# Altium PCB TruckCape for Hammond 1455L - Rev3 - MITM.PcbDoc
Units mil, origin at the board's own origin, x right, y up, seen from the top; angles counter-clockwise.
Board outline 3917.04 x 4734.44 mil, 2 copper layers (Component Side, Bottom Layer), stack 12.8 mil thick; 48 components, 66 nets, 355 pads, 22 vias.
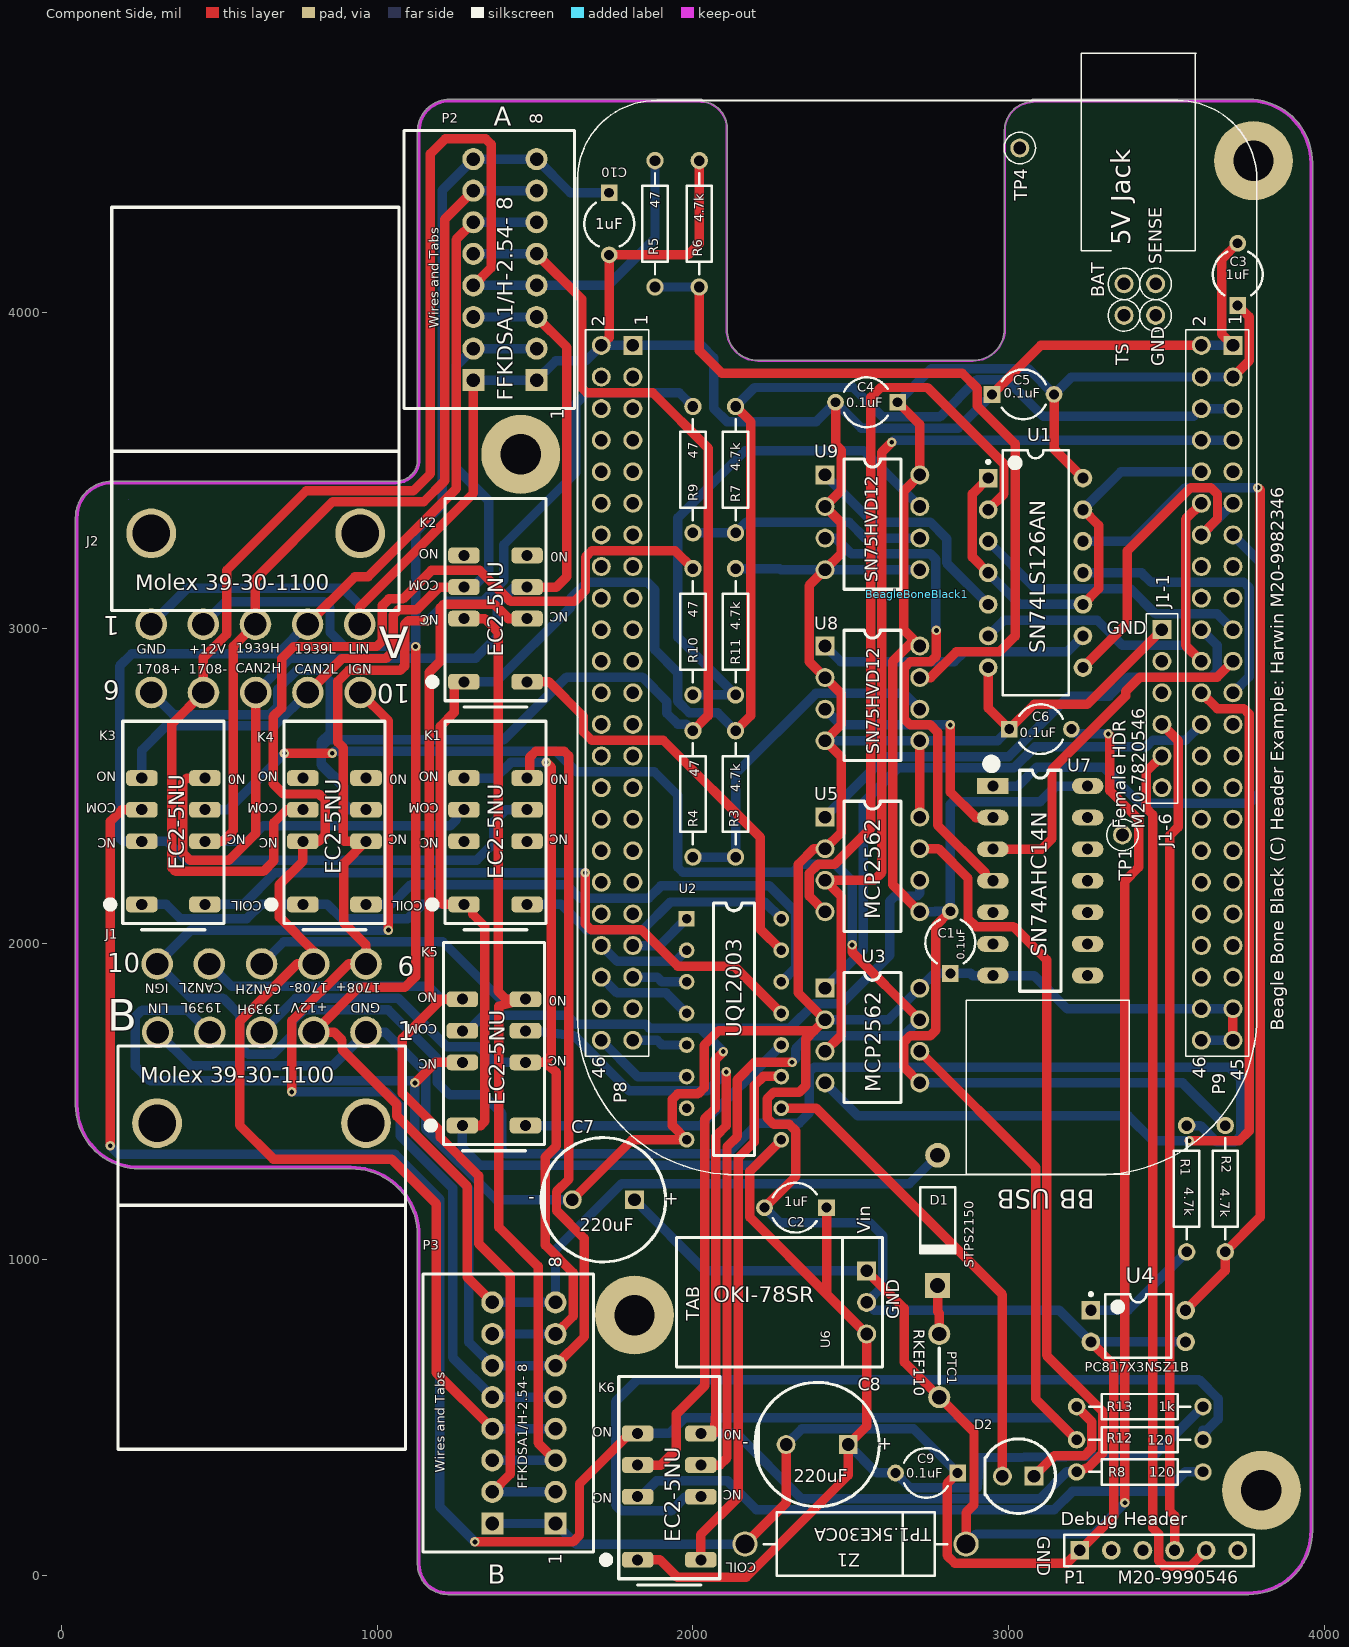
[diagram p0: Component Side view]
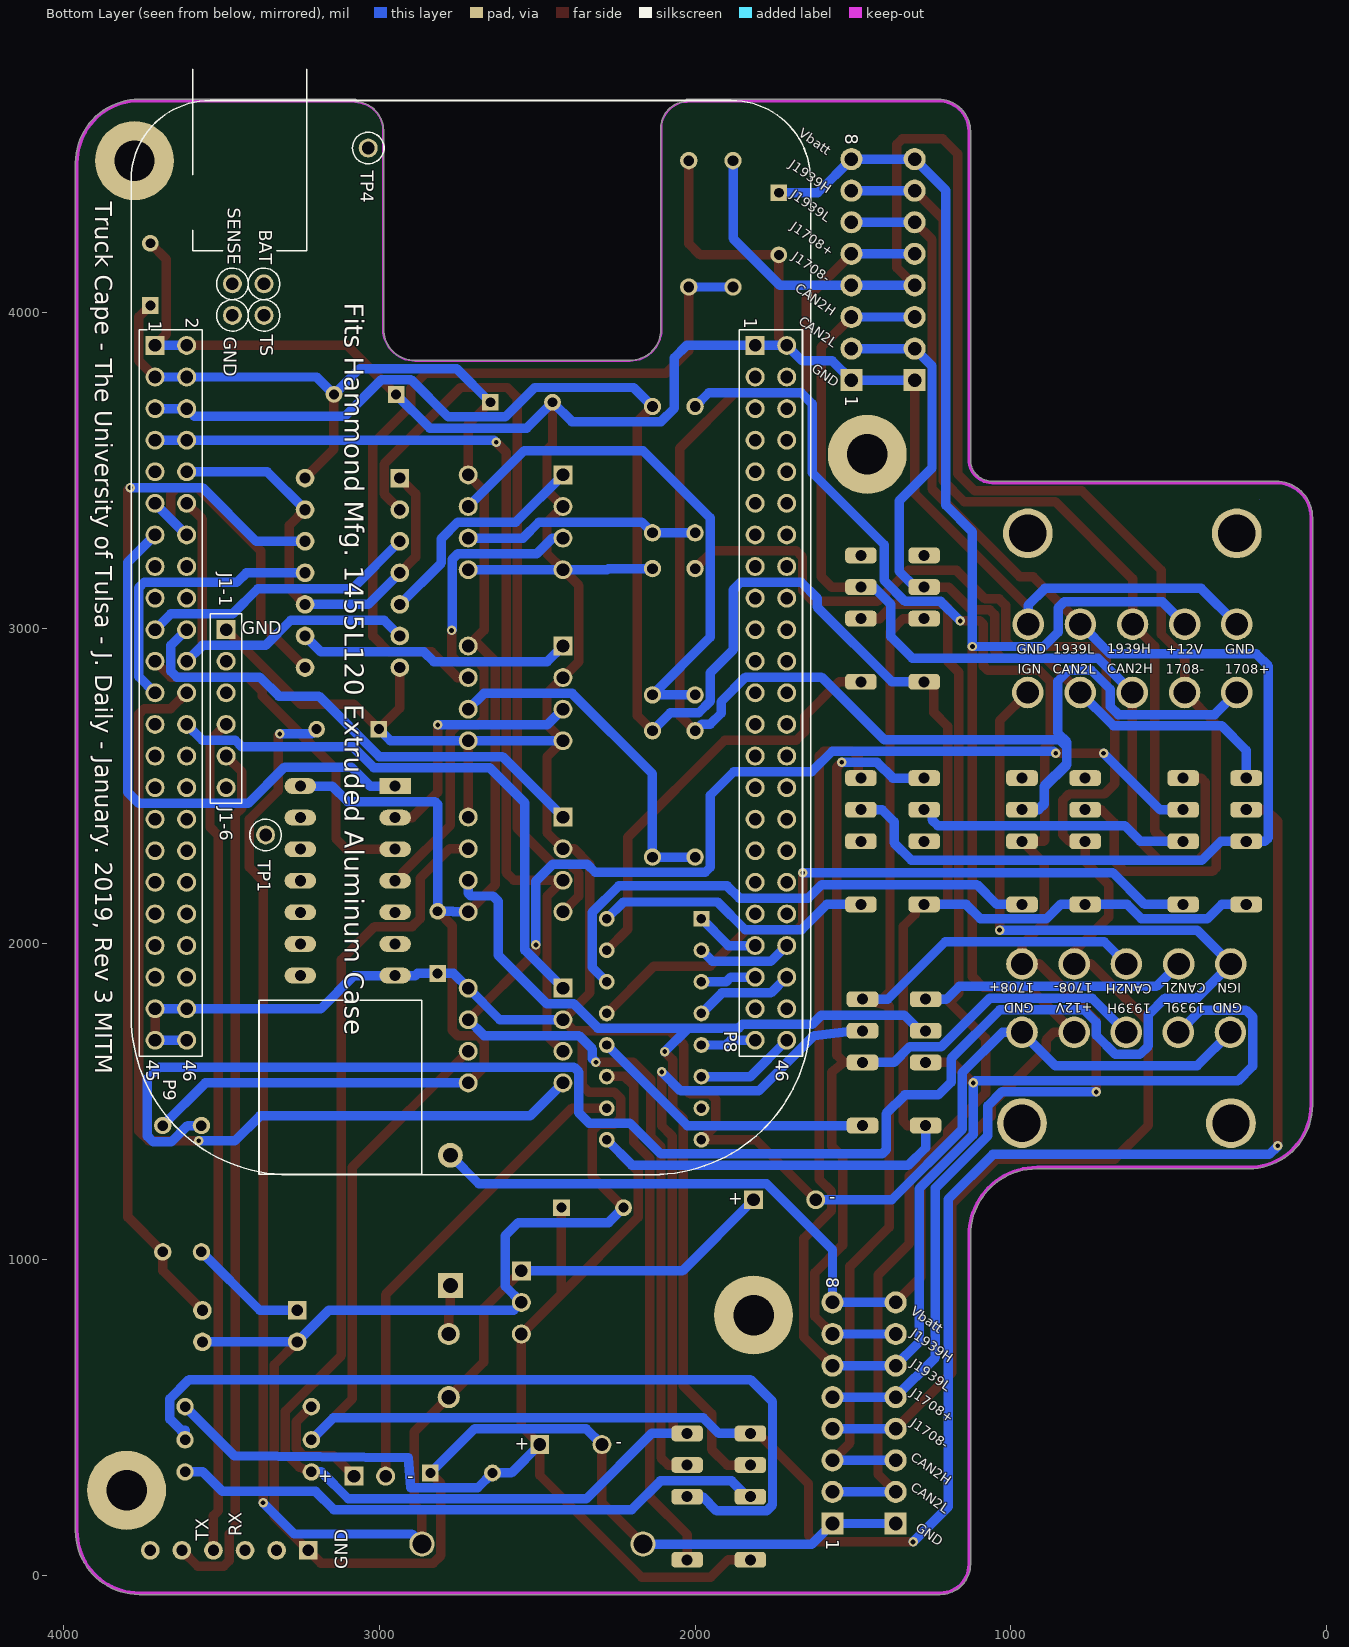
[diagram p1: Bottom Layer view, seen from below]

## Layer stack, top to bottom
Top Solder: solder mask 0.4, Solder Resist, Dk 3.5
Component Side: signal copper 1.4
Dielectric 1: core 10, FR-4, Dk 4.2
Bottom Layer: signal copper 1.4
Solder Side: solder mask 0.4, Solder Resist, Dk 3.5

## Board outline
44.99,1489.82 cw(c246.85,1489.85) 44.99,1489.85 44.98,1489.85 44.98,3350 cw(c160,3350) 160,3465.02 cw(c160,3460) 160.03,3465.01 1059.98,3465.01 ccw(c1059.5,3533.5) 1127.99,3533.5 ccw(c1059.5,3533.5) 1127.99,3533.97 cw(c1133,3534) 1127.98,3534 1127.98,4573 cw(c1229.41,4573) 1229.35,4674.42 cw(c1229.41,4669.41) 1229.41,4674.43 2024.38,4674.43 cw(c2024.38,4669.41) 2029.4,4669.41 cw(c2024.38,4669.41) 2029.05,4667.57 cw(c2024.38,4583.64) 2108.44,4583.69 cw(c2105.92,4583.64) 2108.44,4583.64 2108.44,3945.4 cw(c2105.92,3945.4) 2108.44,3945.35 cw(c2205.92,3945.4) 2108.44,3945.4 ccw(c2105.92,3945.4) 2108.44,3945.4 2108.44,3945.35 ccw(c2205.92,3945.4) 2205.87,3847.91 ccw(c2205.92,3945.4) 2205.92,3847.91 2886.92,3847.91 cw(c2886.92,3845.4) 2886.98,3847.91 ccw(c2886.98,3947.34) 2986.41,3947.28 2986.41,4575.72 cw(c3077.62,4575.72) 3073.32,4666.82 cw(c3077.62,4669.41) 3077.62,4674.43 3760.16,4674.43 cw(c3760.16,4669.41) 3760.24,4674.42 ccw(c3760.16,4472.56) 3760.16,4674.42 3760.24,4674.42 cw(c3760.16,4472.56) 3962.02,4472.59 cw(c3760.16,4472.56) 3962.02,4472.56 ccw(c3957.01,4472.56) 3962.02,4472.59 3962.02,4472.56 3962.02,141.85 cw(c3957.01,141.85) 3962.02,141.82 ccw(c3760.16,141.85) 3962.02,141.85 3962.02,141.82 cw(c3760.16,141.85) 3760.19,-60.01 cw(c3760.16,141.85) 3760.16,-60.01 ccw(c3760.16,-55) 3760.19,-60.01 3760.16,-60.01 1224,-60.01 cw(c1224,36) 1127.98,36 1127.98,1077.01 ccw(c917.01,1077.01) 917.01,1287.99 246.85,1287.99 cw(c246.85,1489.85)

## Design rules (kind name [scope] priority, off if disabled: settings)
Clearance [All] p1: gap=5 ignorepadtopadclearanceinfootprint=FALSE except(0: Arc-Hole Track-Hole SMDPad-Hole THPad-Hole Via-Hole Fill-Hole Poly-Hole Region-Hole Text-Hole)
HoleSize [All] p1: absolutevalues=TRUE maxlimit=250 minlimit=13 maxpercent=80.000 minpercent=20.000
MinimumSolderMaskSliver [All] p1: minsoldermaskwidth=1
PolygonConnect [All] p1: connectstyle=Relief reliefconductorwidth=10 reliefentries=4 polygonreliefangle="90 Angle" airgapwidth=10
RoutingVias [All] p1: holewidth=15 width=30 viastyle="Through Hole" minholewidth=13 minwidth=20 maxholewidth=20 maxwidth=30
SilkToSilkClearance [All] p1: silktosilkclearance=1
SilkToSolderMaskClearance [IsPad] p1: minsilkscreentomaskgap=1 clearancetoexposedcopper=TRUE
SolderMaskExpansion [All] p1: expansion=4
Width [All] p1: maxlimit=100 minlimit=10 preferedwidth=30 minimp=50.000000 maximp=50.000000 favimp=50.000000
26 further rules are at their usual default settings.

## Classes and differential pairs
component class "TruckCape J1708 and Relays v3 - MITM": C1 C5 J1 J2 K1 K2 K3 K4 K5 K6 P2 P3 R3 R4 R5 R6 R7 R8 R9 R10 R11 R12 U7 U8 U9
component class "TruckCape BeagleBone Headers v3 - MITM": BeagleBoneBlack1 C2 C3 C4 C6 C7 C8 C9 C10 D1 D2 P1 PTC1 R1 R2 R13 U1 U2 U3 U4 U5 U6 U? Z1

## Components (designator, comment, footprint, x,y, rotation, side; value= is the part's Value field where it differs from the comment)
BeagleBoneBlack1 "BeagleBoneBlack" Beagleboneblack 4220,3141.5 r90 top locked
C1 "0.1uF" CAPR5-4X5 2815,2005 r90 top
C2 "1uF" CAPR5-4X5 2325,1165 r180 top
C3 "1uF" CAPR5-4X5 3725,4120 r90 top
C4 "0.1uF" CAPR5-4X5 2550,3715 r180 top
C5 "0.1uF" CAPR5-4X5 3045,3740 r0 top
C6 "0.1uF" CAPR5-4X5 3100,2680 r0 top
C7 "220uF" "Elec. Cap 5 x 10mm" 1815,1190 r180 top
C8 "220uF" "Elec. Cap 5 x 10mm" 2491.85,415 r180 top
C9 "0.1uF" CAPR5-4X5 2740,325 r180 top
C10 "1uF" CAPR5-4X5 1735,4280 r270 top
D1 "STPS2150" DO-41 2775,1125 r270 top
D2 "LED" "LED - 5mm Through Hole" 3080,315 r0 top
J1 "Molex 39-30-1100" "10 pos Mini-Fit Jr. R/A Header" 965,1720 r0 top locked
J2 "Molex 39-30-1100" "10 pos Mini-Fit Jr. R/A Header" 284.99,3012.6 r180 top locked
K1 "Relay-DPDT" "RELAY - EC2" 1275,2125 r90 top locked
K2 "Relay-DPDT" "RELAY - EC2" 1275,2830 r90 top
K3 "Relay-DPDT" "RELAY - EC2" 255,2125 r90 top locked
K4 "Relay-DPDT" "RELAY - EC2" 765,2125 r90 top locked
K5 "Relay-DPDT" "RELAY - EC2" 1270,1425 r90 top
K6 "Relay-DPDT" "RELAY - EC2" 1825,50 r90 top
P1 "Use this part in J1-1 to J1-6" HDR1X6 3225,80 r0 top
P2 "Header 8H" "8 CKT Spring Header" 1505,3785 r90 top
P3 "Header 8H" "8 CKT Spring Header" 1565,165 r90 top
PTC1 "RKEF110" PTC 2780,640 r270 top
R1 "4.7k" Axial-0.4 3563.23,1225 r270 top
R2 "4.7k" Axial-0.4 3685.67,1225 r270 top
R3 "4.7k" Axial-0.4 2135,2475 r90 top
R4 "47" Axial-0.4 2000,2475 r90 top
R5 "47" Axial-0.4 1880,4280 r90 top
R6 "4.7k" Axial-0.4 2020,4280 r90 top
R7 "4.7k" Axial-0.4 2135,3501.67 r90 top
R8 "120" Axial-0.4 3415,328.23 r0 top
R9 "47" Axial-0.4 2000,3501.67 r90 top
R10 "47" Axial-0.4 2000,2988.33 r90 top
R11 "4.7k" Axial-0.4 2135,2988.33 r90 top
R12 "120" Axial-0.4 3415,430 r0 top
R13 "1k" AXIAL-0.4 3415,535 r180 top value=4.7k
U1 "SN74LS126AN" N14A 3085,3175 r0 top
U2 "UQL2003" DIP16 1980,2080 r0 top
U3 "MCP2562" DIP8 2418.42,1860 r0 top
U4 "PC817X3NSZ1B" DIP-4 3410,790 r0 top
U5 "MCP2562" DIP8 2418.42,2401.67 r0 top
U6 "OKI-78SR" OKI-78SR 2550,765 r90 top
U7 "SN74AHC14N" DIP14 2950,2500 r0 top
U8 "SN75HVD12" DIP8 2418.42,2943.33 r0 top
U9 "SN75HVD12" DIP8 2418.42,3485 r0 top
Z1 "TP1.5KE30CA" DIODE-0.7 2515,100 r0 top

## Footprints (in the part's own frame and the unit in brackets; to place one, negate y for a bottom-side part, rotate by r counter-clockwise, add the part's x,y. Pads: shape width x height; smd on the part's side, far side on the other; paste and mask are expansions set on the pad)
"8 CKT Spring Header" [mil] "8 Position Wire to Board Terminal Block Vertical with Board 0.100\" (2.54mm) Through Hole"
  rect 70x70 hole 43: 1(0,200) 1(0,0)
  round 70 hole 43: 2(100,200) 2(100,0) 3(200,0) 3(200,200) 4(300,0) 4(300,200) 5(400,0) 5(400,200) 6(500,0) 6(500,200) 7(600,0) 7(600,200) 8(700,0) 8(700,200)
  silkscreen extent -90,-120 790,420
"10 pos Mini-Fit Jr. R/A Header" [mm] "Molex 10 position Mini-Fit Jr. Right Angle Header with Pegs, Series 5569"
  round 4 hole 3: 0(-16.8,-7.3) 0(0,-7.3)
  round 2.54 hole 1.803: 1(0,0) 2(-4.191,0) 3(-8.382,0) 4(-12.573,0) 5(-16.764,0) 6(0,5.5) 7(-4.2,5.5) 8(-8.4,5.5) 9(-12.6,5.5) 10(-16.8,5.5)
  silkscreen extent -19.94,-33.53 3.17,-1.1
Axial-0.4 [mm] "Axial Device, Thru-Hole; 2 Leads; 0.4 in Pin Spacing"
  round 1.4 hole 0.85: 1(-5.08,0) 2(5.08,0)
  silkscreen extent -4.06,-1.02 4.06,1.02
AXIAL-0.4 [mm] "Axial Device, Thru-Hole; 2 Leads; 0.4 in Pin Spacing"
  round 1.4 hole 0.85: 1(-5.08,0) 2(5.08,0)
  silkscreen extent -4.06,-1.02 4.06,1.02
Beagleboneblack [mil] "Flipped Headers, testpoints and Overlay for a BBB Rev C"
  rect 60x60 hole 40 mask+2: 1(753.5,510) J1-1(-146.5,735) P1(753.5,2410)
  round 60 hole 40 mask+2: 2(753.5,610) 3(653.5,510) 4(653.5,610) 5(553.5,510) 6(553.5,610) 7(453.5,510) 8(453.5,610) 9(353.5,510) 10(353.5,610) 11(253.5,510) 12(253.5,610) 13(153.5,510) 14(153.5,610) 15(53.5,510) 16(53.5,610) 17(-46.5,510) 18(-46.5,610) 19(-146.5,510) 20(-146.5,610) 21(-246.5,510) 22(-246.5,610) 23(-346.5,510) 24(-346.5,610) 25(-446.5,510) 26(-446.5,610) 27(-546.5,510) 28(-546.5,610) 29(-646.5,510) 30(-646.5,610) 31(-746.5,510) 32(-746.5,610) 33(-846.5,510) 34(-846.5,610) 35(-946.5,510) 36(-946.5,610) 37(-1046.5,510) 38(-1046.5,610) 39(-1146.5,510) 40(-1146.5,610) 41(-1246.5,510) 42(-1246.5,610) 43(-1346.5,510) 44(-1346.5,610) 45(-1446.5,510) 46(-1446.5,610) J1-2(-246.5,735) J1-3(-346.5,735) J1-4(-446.5,735) J1-5(-546.5,735) J1-6(-646.5,735) P2(753.5,2510) P3(653.5,2410) P4(653.5,2510) P5(553.5,2410) P6(553.5,2510) P7(453.5,2410) P8(453.5,2510) P9(353.5,2410) P10(353.5,2510) P11(253.5,2410) P12(253.5,2510) P13(153.5,2410) P14(153.5,2510) P15(53.5,2410) P16(53.5,2510) P17(-46.5,2410) P18(-46.5,2510) P19(-146.5,2410) P20(-146.5,2510) P21(-246.5,2410) P22(-246.5,2510) P23(-346.5,2410) P24(-346.5,2510) P25(-446.5,2410) P26(-446.5,2510) P27(-546.5,2410) P28(-546.5,2510) P29(-646.5,2410) P30(-646.5,2510) P31(-746.5,2410) P32(-746.5,2510) P33(-846.5,2410) P34(-846.5,2510) P35(-946.5,2410) P36(-946.5,2510) P37(-1046.5,2410) P38(-1046.5,2510) P39(-1146.5,2410) P40(-1146.5,2510) P41(-1246.5,2410) P42(-1246.5,2510) P43(-1346.5,2410) P44(-1346.5,2510) P45(-1446.5,2410) P46(-1446.5,2510) TP1(-796.5,860) TP4(1378.5,1185) TP5(948.5,855) TP6(948.5,755) TP7(848.5,855) TP8(848.5,755)
  silkscreen extent -1872,434 1678,2586
CAPR5-4X5 [mm] "Capacitor; 2 Leads"
  rect 1.35x1.35 hole 0.8: 1(-2.5,0)
  round 1.35 hole 0.8: 2(2.5,0)
  silkscreen extent -1.69,-2 1.82,2
DIODE-0.7 [mil] "Diode, Thru-Hole; 2 Leads; 0.7 in Pin Spacing"
  round 80 hole 60: 1(-350,0) 2(350,0)
  silkscreen extent -290,-100 290,100
DIP8 [mil]
  rect 60x60 hole 40: 1(0,0)
  round 60 hole 40: 2(0,-100) 3(0,-200) 4(0,-300) 5(300,-300) 6(300,-200) 7(300,-100) 8(300,0)
  silkscreen extent 60,-362 240,50
DIP14 [mil]
  rect 100x50 hole 35: 1(0,0)
  oval 100x50 hole 35: 2(0,-100) 3(0,-200) 4(0,-300) 5(0,-400) 6(0,-500) 7(0,-600) 8(300,-600) 9(300,-500) 10(300,-400) 11(300,-300) 12(300,-200) 13(300,-100) 14(300,0)
  silkscreen extent -19,-650 215,84
DIP16 [mil]
  rect 50x50 hole 30: 1(0,0)
  round 50 hole 30: 2(0,-100) 3(0,-200) 4(0,-300) 5(0,-400) 6(0,-500) 7(0,-600) 8(0,-700) 9(300,-700) 10(300,-600) 11(300,-500) 12(300,-400) 13(300,-300) 14(300,-200) 15(300,-100) 16(300,0)
  silkscreen extent 85,-750 215,50
DIP-4 [mm] "DIP; 4 Leads; Row Spacing 7.62 mm; Pitch 2.54 mm"
  rect 1.5x1.5 hole 0.9: 1(-3.81,1.27)
  round 1.5 hole 0.9: 2(-3.81,-1.27) 3(3.81,-1.27) 4(3.81,1.27)
  silkscreen extent -3.93,-2.55 2.65,2.69, body extent -3.15,-2.5 3.15,2.5, height 5.6
DO-41 [mm] "Diode, Axial; Body 5.2 x 2.7 mm (LxDia. max), Lead Dia. 0.86 mm (max)"
  round 2 hole 1.2: 1(-5.23,0)
  rect 2x2 hole 1.2: 2(5.23,0)
  silkscreen extent -2.65,-1.4 2.75,1.4
"Elec. Cap 5 x 10mm" [mil] "2 lead polarized Radial Capacitor with 5 mm lead spacing and 10 mm diameter can"
  rect 60x60 hole 40: 1(0,0)
  round 60 hole 40: 2(196.85,0)
  silkscreen extent -98,-197 295,197
HDR1X6 [mm] "Connector; Header; 6 Position"
  rect 1.5x1.5 hole 0.9: 1(0,0)
  round 1.5 hole 0.9: 2(2.54,0) 3(5.08,0) 4(7.62,0) 5(10.16,0) 6(12.7,0)
  silkscreen extent -1.27,-1.27 13.97,1.27
"LED - 5mm Through Hole" [mil] "Vishay TLCS510 Ultrabright LED, Ø 5 mm Untinted Non-Diffused Package"
  rect 60x60 hole 40: 1(0,0)
  round 60 hole 40: 2(-100,0)
  silkscreen extent -155,-118 68,118
N14A [mm] "DIP, 14-Leads, Row Spacing 7.62mm, Pitch 2.54mm, Body 19.18x6.35mm"
  rect 1.5x1.5 hole 0.9: 1(-3.81,7.62)
  round 1.5 hole 0.9: 2(-3.81,5.08) 3(-3.81,2.54) 4(-3.81,0) 5(-3.81,-2.54) 6(-3.81,-5.08) 7(-3.81,-7.62) 8(3.81,-7.62) 9(3.81,-5.08) 10(3.81,-2.54) 11(3.81,0) 12(3.81,2.54) 13(3.81,5.08) 14(3.81,7.62)
  silkscreen extent -3.93,-9.85 2.65,9.85, body extent -3.55,-9.85 3.55,9.85, height 5.08
OKI-78SR [mil] "Horizontal Mount SIP DC/DC Converter"
  rect 60x60 hole 40: 1(200,0)
  round 60 hole 40: 2(100,0) 3(0,0)
  silkscreen extent -105,-50 305,602
PTC [mil] "TE RGEF600-2"
  round 70 hole 45: 1(-125,0) 2(75,0)
  silkscreen extent -80,0 33,0
"RELAY - EC2" [mil] "EC2 Relay"
  rrect50% 50x100 hole 35: 1(300,0) 2(200,0) 3(400,0) 4(300,-200) 5(200,-200) 6(400,-200) 7(0,-200) 8(0,0)
  silkscreen extent -80,-260 580,110

## Part data
BeagleBoneBlack1: "46 Positions Header, Breakaway Connector 0.100\" (2.54mm) Through Hole Tin", Manufacturer="Sullins Connector Solutions", PartNumber=PREC023DAAN-RC, Supplier Part Number 1=S2012EC-23-ND, Supplier 1=Digi-Key
C1 C4 C5 C6 C9: library part Cap, "CAP CER 0.1UF 100V X7R RADIAL", Manufacturer="Vishay BC Components", PartNumber=K104K20X7RH53H5, Supplier Part Number 1=BC5139-ND, Supplier 1=Digi-Key
C2 C3 C10: library part Cap, "CAP CER 1UF 100V X7R RADIAL", Manufacturer="Murata Electronics North America", PartNumber=RDER72A105K2M1H03A, Supplier Part Number 1=490-9198-1-ND, Supplier 1=Digi-Key
C7 C8: library part "Electrolytic Cap", "220µF 50V Aluminum Electrolytic Capacitors Radial, Can 175 mOhm @ 10kHz 5000 Hrs @ 105°C", Manufacturer="EPCOS (TDK)", PartNumber=B41858C6227M000, Supplier Part Number 1=495-6000-ND, Supplier 1=Digi-Key
D1: library part "Diode 1N4003", "Diode Schottky 150V 2A Through Hole DO-15", Manufacturer=STMicroelectronics, Supplier Part Number 1=497-3213-1-ND, PartNumber=STPS2150, Supplier 1=Digi-Key
D2: "Light Emmitting Diode"
J1 J2: library part "10 Pos Header", "10 Positions Header Connector 0.165\" (4.20mm) Through Hole, Right Angle Tin", Manufacturer=Molex, PartNumber=39-30-1100, Supplier Part Number 1=WM1355-ND, Supplier 1=Digi-Key
K1 K2 K3 K4 K5 K6: "Dual-Pole Dual-Throw Relay", LatestRevisionDate=17-Jul-2002, LatestRevisionNote="Re-released for DXP Platform.", PackageDescription="Relay; 8 Leads", PackageReference=DIP-P8, Published=24-Mar-1999, Publisher="Altium Limited"
P1: library part "Header 6", "CONN HEADER FEMALE 6POS .1\" GOLD", Manufacturer="Sullins Connector Solutions", PartNumber=PPPC061LFBN-RC, Supplier Part Number 1=S7039-ND, Supplier 1=Digi-Key
P2 P3: "Header, 8-Pin, Right Angle", LatestRevisionDate=17-Jul-2002, LatestRevisionNote="Re-released for DXP Platform.", Publisher="Altium Limited"
PTC1: library part "SMD Resistor", "Polymeric PTC Resettable Fuse 60V 1.1A Ih Through Hole Radial, Disc", Manufacturer="Littelfuse Inc.", Supplier Part Number 1=RKEF110HF-ND, PartNumber=RKEF110, Supplier 1=Digi-Key
R1 R2 R3 R6 R7 R11: library part "Chip Resistor", "RES SMD 4.7K OHM 1% 1/10W 0603", Manufacturer=Yageo, PartNumber=CFR-25JB-52-4K7, Supplier Part Number 1=4.7KQBK-ND, Supplier 1=Digi-Key
R4 R5 R8 R9 R10 R12: library part "Chip Resistor", "47 Ohms ±5% 0.25W, 1/4W Through Hole Resistor Axial  Carbon Film", Manufacturer=Yageo, PartNumber=CFR-25JB-52-47R, Supplier Part Number 1=47QBK-ND, Supplier 1=Digi-Key
R13: library part Res2, "Resistor", LatestRevisionDate=17-Jul-2002, LatestRevisionNote="Re-released for DXP Platform.", PackageDescription="Axial Device, Thru-Hole; 2 Leads; 0.4 in Pin Spacing", PackageReference=AXIAL-0.4, Published=8-Jun-2000, Publisher="Altium Limited"
U1: library part DM74LS126AN, "Quad 3-State Buffer", Manufacturer="Texas Instruments", Supplier Part Number 1=296-3643-5-ND, ComponentLink1Description="Manufacturer Link", ComponentLink1URL=http://www.fairchildsemi.com/, DatasheetVersion=Mar-1998, LatestRevisionDate=29-May-2009, LatestRevisionNote="Component Body Added.", PackageDescription="DIP, 14-Pin, Row Spacing 7.62 mm, Pitch 2.54 mm", PackageReference=N14A, PackageVersion=2000, PartNumber=SN74LS126AN, Published=17-Jul-2002, Publisher="Altium Limited", Supplier 1=Digi-Key
U2: library part ULQ2003, "High voltage, high current Darlington arrays each containing seven open collector Darlington pairswith common emitters."
U3 U5: library part SN65HVD232DR, "1/1 Transceiver Half CAN 8-PDIP", Drivers Per Package=1, Manufacturer="Microchip Technology", PartNumber=MCP2562-E/P, Rating=Catalog, Supplier Part Number 1=MCP2562-E/P-ND, Supply Voltage(s)(V)=3.3, Code_JEDEC=MS-012AA, ComponentLink1Description=Datasheet, ComponentLink1URL=http://www.ti.com/general/docs/lit/getliterature.tsp?genericPartNumber=SN65HVD232&fileType=pdf, DatasheetVersion=SLOS346K, Eco-Plan="Green (RoHS & no Sb/Br)", ICC(Max)(mA)=17, Isolated=No, Mounting Technology="Surface Mount", PackageDescription="8-Pin Plastic Small Outline Integrated Circuit, 4.9 x 3.9 mm, Pitch 1.27 mm Pitch", PackageReference=D8, PackageVersion="revM, Jun-2011", Receivers Per Package=1, SubFamily=CAN, Supplier 1=Digi-Key, Supplier 2=Digi-Key, Supplier 3=Digi-Key, Supplier 4=Newark, Supplier 5=Mouser, Supplier Part Number 2=296-26344-1-ND, Supplier Part Number 3=296-26344-6-ND, Supplier Part Number 4=75C7753, Supplier Part Number 5=595-SN65HVD232DR, Transient Pulse Protection(V)="-25 to 25"
U4: library part Optoisolator1, "4-Pin Phototransistor Optocoupler", DatasheetVersion=Nov-2003, LatestRevisionDate=04-Mar-2005, LatestRevisionNote="Sch pins 3 & 4 Swapped.", PackageReference=DIP-4, Published=24-Mar-1999, Publisher="Altium Limited"
U6: library part 7805, "5V DC/DC Converter (7805 replacement)", Manufacturer="Murata Power Solutions Inc.", PartNumber=OKI-78SR-5/1.5-W36H-C, Supplier Part Number 1=811-2692-ND, Supplier 1=Digi-Key, Supplier 2=Digi-Key, Supplier Part Number 2=811-2692-ND
U7: library part "74VHC14 Hex Inverter", "Inverter IC 6 Channel Schmitt Trigger 14-PDIP", Manufacturer="Texas Instruments", Supplier Part Number 1=296-4550-5-ND, PartNumber=SN74AHC14N, Supplier 1=Digi-Key
U8 U9: library part "SN75HVD12D (3.3v RS485)", "IC 3.3V DIFF TXRX 8-SOIC", Manufacturer="Texas Instruments", PartNumber=SN75HVD12P, Supplier 1=Digi-Key, Supplier Part Number 1=SN75HVD12P
Z1: library part Zener, "TVS DIODE 25.6V 41.4V DO201", Manufacturer="Littelfuse Inc.", Supplier Part Number 1=F7610CT-ND, PartNumber=TP1.5KE30CA, Supplier 1=Digi-Key

## Free pads (board coordinates)
  round 250 hole 128: 0(1455,3550) 0(1815,825) 0(3775,4480) 0(3800,270)

## Via types
v1: diameter 30, hole 15, Component Side to Bottom Layer, 22 vias

## Nets (pads, with @x,y where several pads share a name; then routed paths per layer and width w, separated by ;. In a path a pad name is that pad's centre, name@x,y a point inside that pad or via, vN(x,y) a via of type N, cw(c..) or ccw(c..) an arc to the next point about the centre after c; other vN are vias at no path point)
3V3: BeagleBoneBlack1.3 BeagleBoneBlack1.4 C1.2 C3.1 C4.1 C5.2 R2.1 U1.14 U3.5 U5.5 U7.14 U8.8 U9.8 | length 6074
  Component Side w30: C4.1 2718.42,3645 U9.8 2667.98,3434.56 2667.98,2993.78 U8.8@2699.71,2962.05 ; U3.5 2667.98,1610.44 2667.98,1690 2687.98,1710 2751.98,1710 2768.42,1726.44 2768.42,2056.85 C1.2 ; U5.5 2633.42,2186.67 2633.42,2895.76 U8.8@2699.71,2962.05 ; U8.8 U8.8@2699.71,2962.05 ; C5.2 3143.43,3566.57 U1.14 ; BeagleBoneBlack1.3 3760.98,3845.98 3760.98,3985.59 C3.1
  Bottom Layer w30: C4.1 2755,3821.58 3061.85,3821.58 C5.2 3198.43,3795 BeagleBoneBlack1.4 BeagleBoneBlack1.3 ; U3.5 3550.67,1560 R2.1 ; U5.5 2764.98,2101.67 2766.74,2103.43 C1.2 2815,2441.78 2823.98,2450.76 3099.98,2450.76 3149.22,2500 U7.14
5V0: BeagleBoneBlack1.5 BeagleBoneBlack1.6 C2.1 C8.1 C9.2 K1.8 K2.8 K3.8 K4.8 K5.8 K6.8 R3.2 R7.2 R13.1 U2.9 U6.3 | length 11750.6
  Component Side w30: K5.8 1327.98,1425 1340.98,1438 1340.98,2055.76 1302.98,2093.76 1302.98,2125 K1.8 1207.98,2125 1199.98,2133 1199.98,2688.76 1243.98,2732.76 1243.98,2830 K2.8 ; K6.8 1895.74,50 1950.98,-5.24 2168.98,-5.24 2491.85,317.63 C8.1 2550,473.15 U6.3 2423.43,891.57 ; R3.2 2182.98,2722.98 2182.98,3653.68 R7.2 ; U2.9 2179.98,1279.98 2179.98,1135.02 2423.43,891.57 ; C2.1 2423.43,891.57
  Bottom Layer w30: K3.8 332.74,2125 377.98,2079.76 586.74,2079.76 631.98,2125 K4.8 842.74,2125 887.98,2079.76 1096.74,2079.76 1141.98,2125 K1.8 ; K5.8 1269.98,1354.76 1324.74,1300 2200,1300 U2.9 ; K2.8 1376.98,2830 1613.98,3067 1613.98,3095 1663.98,3145 1855.98,3145 1878.98,3122 1878.98,2931.76 1952.44,2858.3 1952.44,2767.76 1988.44,2731.76 2078.24,2731.76 R3.2 ; R7.2 2195.1,3761.76 2507.64,3761.76 2600.98,3668.42 2781.83,3668.42 2899.98,3786.58 2993.15,3786.58 3108.96,3670.76 3585.76,3670.76 BeagleBoneBlack1.6 BeagleBoneBlack1.5 ; C8.1 2581.85,325 C9.2 2688.15,278.42 2899.75,278.42 2907.98,373.76 3458.76,378.76 R13.1
12V0: C6.2 C7.1 PTC1.2 U6.1 Z1.2 | length 5016.1
  Component Side w30: U6.1 2668.98,846.02 2668.98,676.02 PTC1.2 2889.98,455.02 2889.98,224.76 2865,199.78 Z1.2 ; v1(3315,2665) 3320,2660 3320,2485.74 3410.98,2394.76 3410.98,2242.76 3367.98,2199.76 v1(3367.98,230.76)
  Bottom Layer w30: C7.1 2040,965 U6.1 ; Z1.2 2896.76,131.76 3268.98,131.76 v1(3367.98,230.76) ; C6.2 3213.42,2665 v1(3315,2665)
CAN2H-A: J2.8 K2.4 K3.6 P2.3 | length 3280.5
  Component Side w30: K3.6 398.22,2525 384.98,2511.76 384.98,2287.76 407.98,2264.76 530.98,2264.76 615.7,2349.48 J2.8 ; K2.4 1567.98,3130 1600.98,3163 1600.98,3889.02 P2.3@1505,3985
  Bottom Layer w30: J2.8 724.39,2904.76 1311.98,2904.76 1380,2972.78 1380,3075.26 1434.74,3130 K2.4 ; P2.3@1305,3985 P2.3@1505,3985
CAN2H-B: J1.8 K2.2 K5.6 P3.3 | length 4099.8
  Component Side w30: K2.2 1340.98,3030 1382.98,2988 1382.98,1850 1407.98,1825 K5.6 1385.98,1803 1385.98,1102.76 1509.98,978.76 1509.98,420.02 P3.3@1565,365
  Bottom Layer w30: J1.8 704.52,2006.76 1208.22,2006.76 1389.98,1825 K5.6 ; P3.3@1365,365 P3.3@1565,365
CAN2L-A: J2.9 K2.1 K3.3 P2.2 | length 2459.7
  Component Side w30: J2.9 888.75,2903.76 1027.98,2903.76 1051.98,2927.76 1051.98,3042.22 1067.28,3057.52 1124.82,3057.52 1197.3,3130 K2.1
  Bottom Layer w30: K3.3 254.98,2612.76 333.28,2691.06 676.05,2691.06 J2.9 ; K2.1 1304.1,3130 1353.98,3179.88 1353.98,3402.76 1249.98,3506.76 1249.98,3829.98 1305,3885 P2.2@1505,3885
CAN2L-B: J1.9 K2.5 K5.3 P3.2 | length 4469
  Component Side w30: K5.3 1203.98,1825 ; P3.2@1365,265 1420.98,320.98 1420.98,951.76 1321.48,1051.26 1321.48,1266.26 1199.98,1387.76 1199.98,1407.26 1080.11,1527.13 1080.11,1701.13 1203.98,1825 ; K2.5 1415.76,3030 1370,3075.76 1211.98,3075.76 1200.58,3064.36 1200.58,2895.36 1164.98,2859.76 1164.98,1844 1183.98,1825 1203.98,1825
  Bottom Layer w30: J1.9 539.71,1865.76 1163.72,1865.76 1204.48,1825 K5.3 ; P3.2@1365,265 P3.2@1565,265
"Coil 1": K1.7 U2.16 | length 896.3
  Bottom Layer w30: K1.7 1582.98,2125 1662.98,2045 1841.22,2045 1928.98,2132.76 2227.24,2132.76 U2.16
"Coil 2": K2.7 U2.15 | length 1356.4
  Component Side w30: K2.7 1543.98,2830 1652.98,2721 1652.98,2671.76 1679.74,2645 1905.98,2645 2213.98,2337 2213.98,2046.02 U2.15
"Coil 3": K4.7 U2.14 | length 1694.3
  Bottom Layer w30: K4.7 1044.98,2125 1107.74,2187.76 1599.22,2187.76 1641.98,2145 1859.98,2145 1898.74,2183.76 2241.98,2183.76 2325.98,2099.76 2325.98,1925.98 U2.14
"Coil 4": K3.7 U2.13 | length 2146.3
  Component Side w30: v1(1658.98,2225.76) 1658.98,2063.76 1677.74,2045 1836.74,2045 1951.98,1929.76 2130.24,1929.76 U2.13
  Bottom Layer w30: K3.7 576.98,2125 677.74,2225.76 v1(1658.98,2225.76)
"Coil 5": K5.7 U2.12 | length 915.6
  Bottom Layer w30: K5.7 2025,1425 U2.12
"Coil 6": K6.7 U2.11 | length 1670.3
  Component Side w30: K6.7 2024.98,129.76 2142.98,247.76 2142.98,1321.45 2194.42,1372.88 2194.42,1551.76 2223.42,1580.76 2280,1580.76 U2.11
DCAN0H: K5.4 K6.6 R8.1 U5.7 | length 5607
  Component Side w30: K6.6 2067.25,450 2072.98,516.62 2072.98,1391.45 2105.73,1424.2 v1(2105.73,1594.68) ; U5.7 2777.08,2301.67 2870.98,2207.76 2870.98,2079.76 2895.98,2054.76 3014.98,2054.76 3119.98,1949.76 3119.98,697.28 3297.56,519.7 3297.56,387.84 3253.48,343.76 R8.1
  Bottom Layer w30: K5.4 1494.98,1725 1623.4,1709.76 1798.4,1534.76 2045.81,1534.76 v1(2105.73,1594.68) ; K6.6 2137.74,450 2344.32,243.42 3098.41,243.42 3183.21,328.23 R8.1
DCAN0L: K5.1 K6.1 U5.6 | length 3374.2
  Component Side w30: K6.1 1898.22,350 1947.98,399.76 1947.98,511.76 2037.98,601.76 2037.98,1447.2 2070.73,1479.95 2070.73,1632.99 2095.98,1658.24 v1(2095.98,1659.24)
  Bottom Layer w30: K5.1 1287.98,1725 1337.74,1774.76 1599.98,1774.76 1629.74,1745 1850.98,1745 1862.22,1733.76 2021.46,1733.76 ; v1(2095.98,1659.24) 2021.46,1733.76 ; U5.6 2718.42,2159.76 2710.42,2151.76 2639.98,2151.76 2623.98,2135.76 2623.98,1965 2468.98,1810 2383.98,1810 2307.74,1733.76 2021.46,1733.76
DCAN1H: K3.4 K6.4 U3.7 | length 4955.3
  Component Side w30: v1(706.74,2603.76) v1(857.98,2603.76) ; K6.4 2085.22,350 2107.98,372.76 2107.98,1357.72 2140.73,1390.47 2140.73,1570.51 2195.98,1625.76 v1(2313.98,1625.76) ; v1(2503.98,1996.76) 2503.98,1974.44 U3.7
  Bottom Layer w30: K3.4 527.98,2425 v1(706.74,2603.76) ; v1(857.98,2603.76) 864.22,2610 1565.98,2610 1630.98,2545 1877.74,2545 1951.98,2470.76 1951.98,2242.76 1967.98,2226.76 2315.98,2226.76 2340.89,2251.67 2451.08,2251.67 2503.98,2198.76 v1(2503.98,1996.76) ; v1(2313.98,1625.76) 2324.98,1636.76 2324.98,1667 2367.98,1710 2668.42,1710 U3.7
DCAN1L: K3.1 K6.3 R12.1 U3.6 | length 7015.8
  Component Side w30: v1(154.98,1360.76) 154.98,2388 191.98,2425 K3.1 ; v1(1309.98,106.76) 1619.98,106.76 1640.98,127.76 1640.98,291 1799.98,450 K6.3 ; U3.6 3084.98,1293.44 3084.98,560.02 R12.1
  Bottom Layer w30: v1(154.98,1360.76) 181.98,1333.76 1056.98,1333.76 1198.98,1191.76 1198.98,217.76 v1(1309.98,106.76) ; K6.3 1924.98,450 1974.98,500 3145,500 R12.1
DEBUGRX: BeagleBoneBlack1.J1-4 P1.4 | length 2653.1
  Component Side w30: BeagleBoneBlack1.J1-4 3535.98,2644.02 3535.98,2369.76 3509.98,2343.76 3509.98,204.76 3525,189.74 P1.4
DEBUGTX: BeagleBoneBlack1.J1-5 P1.5 | length 2762.8
  Component Side w30: BeagleBoneBlack1.J1-5 3434.98,2544.98 3434.98,2430 3455.98,2409 3455.98,150.76 3474.98,131.76 3474.98,47.76 3492.98,29.76 3574.76,29.76 P1.5
GND: BeagleBoneBlack1.1 BeagleBoneBlack1.2 BeagleBoneBlack1.43 BeagleBoneBlack1.44 BeagleBoneBlack1.45 BeagleBoneBlack1.46 BeagleBoneBlack1.J1-1 BeagleBoneBlack1.P1 BeagleBoneBlack1.P2 C1.1 C2.2 C3.2 C4.2 C5.1 C6.1 C7.2 C8.2 C9.1 C10.2 J1.1 J1.5 J2.1 J2.5 P1.1 P2.1 P3.1 R6.2 R11.2 U1.7 U2.8 U3.2 U3.8 U4.2 U4.3 U5.2 U5.8 U6.2 U7.7 U8.2 U8.4 U8.5 U9.2 U9.4 U9.5 Z1.1 | length 20578.9
  Component Side w30: J2.5 944.99,3066.72 1305,3426.73 P2.1@1305,3785 ; C7.2 1808.15,1380 U2.8 1935,1425 1935,1508.02 1951.98,1525 2015.98,1525 2035.73,1544.75 2035.73,1679.76 2081.73,1725.76 2384.19,1725.76 ; BeagleBoneBlack1.P2 1735,3920 C10.2 1983.98,4181.58 2020,4217.59 R6.2 ; Z1.1 2295,230 C8.2 ; C2.2 2325.98,1264.41 2325.98,1407.76 2304.98,1428.76 2255.98,1428.76 2234.98,1449.76 2234.98,1509.76 2255.98,1530.76 2336.98,1530.76 2357.98,1551.76 2357.98,1699.56 2384.19,1725.76 ; C4.2 2451.57,3581.17 2468.98,3563.76 2468.98,3435.56 U9.2 2468.98,3334.44 2468.98,3235.56 U9.4 2367.98,3134.56 2367.98,2893.78 U8.2 2468.98,2792.78 2468.98,2693.89 U8.4 2468.98,2592.78 2468.98,2352.22 U5.2 2382.98,2301.67 2333.42,2252.11 2333.42,1845 U3.2 2384.19,1725.76 ; U5.8 U8.5 ; C9.1 2804.98,291.56 2804.98,63.76 2828.98,39.76 3184.76,39.76 P1.1 3332.56,187.56 3332.56,667.44 U4.2 ; U1.7 2935,2746.57 C6.1 3080.56,2758.98 3248.98,2758.98 BeagleBoneBlack1.J1-1 ; C5.1 3101.57,3895 BeagleBoneBlack1.2 ; BeagleBoneBlack1.45 BeagleBoneBlack1.43 ; BeagleBoneBlack1.1 3673.98,3931.02 3673.98,4167.41 C3.2
  Bottom Layer w30: J2.1 398.15,3125.76 892.24,3125.76 944.99,3073.01 J2.5 ; J1.5 410,1615 860,1615 J1.1 1026.74,1720 1154.74,1592 1154.74,1412.66 1377.41,1190 C7.2 ; P2.1@1305,3785 1505,3785 1565.76,3845.76 1660.76,3845.76 BeagleBoneBlack1.P2 BeagleBoneBlack1.P1 2026.74,3895 2065.98,3855.76 2065.98,3695.76 2107.98,3653.76 2390.34,3653.76 C4.2 2533.15,3633.42 2840,3633.42 C5.1 ; P3.1@1365,165 1565,165 1630,100 Z1.1 ; R11.2 2274.98,3188.33 2278.32,3185 U9.4 U9.5 ; C2.2 2273.81,1117.76 2559.98,1117.76 2600.98,1076.76 2600.98,915.98 U6.2 2574.24,840.76 3159.24,840.76 U4.2 U4.3 ; C8.2 2345,465 2698.43,465 C9.1 ; U3.2 2618.42,1760 U3.8 2765,1906.57 C1.1 2878.98,1906.57 2885.56,1900 U7.7 3079.98,1900 3184.98,1795 BeagleBoneBlack1.44 BeagleBoneBlack1.43 ; U8.4 U8.5 2964.91,2643.33 C6.1 ; BeagleBoneBlack1.46 BeagleBoneBlack1.45 ; BeagleBoneBlack1.2 BeagleBoneBlack1.1
IGNITION: J1.10 J2.10 R1.1 | length 6141.9
  Component Side w30: J2.10 1035.98,2706.49 v1(1035.98,2043.76)
  Bottom Layer w30: v1(1035.98,2043.76) 410.81,2043.76 J1.10 411.36,1828.76 511.98,1828.76 564.98,1775.76 564.98,1677 591.98,1650 669.22,1650 729.98,1710.76 729.98,1752 769.74,1791.76 1034.98,1791.76 1189.74,1637 1189.74,1562 1229.98,1521.76 1335.98,1521.76 1395.12,1462.62 1395.12,1347.86 1407.98,1335 2108.98,1335 2206.98,1433 2335.98,1433 2367.98,1465 2367.98,1594 2383.98,1610 3696.98,1610 3733.98,1573 3733.98,1391.76 3715.98,1373.76 3657.98,1373.76 3606.74,1425 R1.1
J1708+A: J2.6 K4.4 P2.5 R4.2 | length 4884.4
  Component Side w30: P2.5@1505,4185 1647.98,4042.02 1647.98,3761 1663.98,3745 1872.98,3745 2047.98,3570 2047.98,2722.98 R4.2
  Bottom Layer w30: J2.6 354.99,2726.06 660,2726.06 685.7,2751.76 685.7,2806.48 745.98,2866.76 816.98,2866.76 851.98,2831.76 851.98,2668.4 822.77,2639.19 822.77,2566.94 894.77,2494.94 894.77,2444.98 894.98,2444.76 ; K4.4 914.74,2425 ; P2.5@1305,4185 P2.5@1505,4185 ; R4.2 1978.95,2696.05 1951.98,2696.05 1917.44,2730.59 1917.44,2767.54 1839.98,2845 1599.98,2845 1400.74,2645.76 844.98,2645.76 822.98,2623.76 822.98,2571.76 894.98,2499.76 894.98,2444.76 ; 894.98,2444.76 894.98,2442 911.98,2425 914.74,2425 ; 894.98,2444.76 914.74,2425
J1708+B: J1.6 K4.5 P3.5 R9.2 | length 4961.6
  Component Side w30: v1(729.98,1531.34) 729.98,1756.76 909.76,1936.54 J1.6 965,1996.74 894.98,2066.76 894.98,2254.98 K4.5 895.98,2325 892.98,2328 892.98,2621.76 875.98,2638.76 875.98,2831.76 910.98,2866.76 1073.98,2866.76 1086.98,2879.76 1086.98,3011.43 1098.07,3022.52 v1(1160.32,3022.52)
  Bottom Layer w30: v1(729.98,1531.34) 1029.4,1531.34 1072.98,1487.76 1072.98,1393.26 1238.98,1227.26 1238.98,691.02 1365,565 P3.5@1565,565 ; v1(1160.32,3022.52) 1222.56,3084.76 1334.98,3084.76 1400.98,3150.76 1400.98,3263.76 1628.98,3491.76 1628.98,3710 1663.98,3745 1956.67,3745 R9.2
J1708-A: J2.7 K4.1 P2.4 R5.2 | length 4941
  Component Side w30: K4.1 714.22,2425 672.98,2383.76 672.98,2262.76 639.98,2229.76 361.98,2229.76 349.98,2241.76 349.98,2695.7 J2.7 450.34,2907.12 523.98,2980.76 523.98,3183 775.98,3435 1115.22,3435 1168.98,3488.76 1168.98,4501.76 1215.98,4548.76 1343.98,4548.76 1360.98,4531.76 1360.98,4140.98 P2.4@1305,4085
  Bottom Layer w30: P2.4@1305,4085 1505,4085 1731.22,4085 1880,4233.78 R5.2
J1708-B: J1.7 K4.2 P3.4 R10.2 | length 5272.8
  Component Side w30: P3.4@1365,465 1186.98,643.02 1186.98,1177.76 1045.98,1318.76 671.98,1318.76 564.98,1425.76 564.98,1754.76 746.76,1936.54 J1.7 799.65,1976.1 690.98,2084.76 690.98,2187.74 765,2261.76 K4.2 815.98,2325 835.98,2345 835.98,2454.76 815.98,2474.76 703.98,2474.76 670.98,2507.76 670.98,2719.76 697.98,2746.76 697.98,2903.76 735.98,2941.76 998.98,2941.76 1016.98,2959.76 1016.98,3071.76 1037.74,3092.52 1081.98,3092.52 1172.22,3182.76 1324.98,3182.76 1422.98,3084.76 1624.98,3084.76 1659.98,3119.76 1659.98,3225 1679.98,3245 1943.33,3245 R10.2
  Bottom Layer w30: P3.4@1365,465 P3.4@1565,465
J1939H-A: J2.3 K1.1 K3.5 P2.7 | length 3694.8
  Component Side w30: K3.5 511.98,2325 544.98,2358 544.98,2942.59 J2.3 614.99,3155.77 859.22,3400 1147.82,3400 1213.98,3466.16 1213.98,4293.98 P2.7@1305,4385
  Bottom Layer w30: K3.5 589.98,2325 639.74,2374.76 1231.98,2374.76 1249.98,2392.76 1249.98,2425 K1.1 ; P2.7@1305,4385 P2.7@1505,4385
J1939H-B: J1.3 K1.3 K5.5 P3.7 | length 3422
  Component Side w30: K5.5 1528.22,1625 ; v1(1535.98,2575) 1550.98,2560 1550.98,1647.76 1528.22,1625 ; P3.7@1565,765 1620.98,820.98 1620.98,958.58 1533.15,1046.41 1533.15,1325.28 1567.98,1360.11 1567.98,1593 1528.22,1625
  Bottom Layer w30: J1.3 742.5,1827.5 1067.5,1827.5 1220.24,1674.76 1320.22,1674.76 1369.98,1625 K5.5 ; K1.3 1373.98,2525 1423.98,2575 v1(1535.98,2575) ; P3.7@1365,765 P3.7@1565,765
J1939L-A: J2.4 K1.4 K3.2 P2.6 | length 4333.5
  Component Side w30: J2.4 929.91,3162.52 971.65,3162.52 1249.98,3440.86 1249.98,4229.98 P2.6@1305,4285
  Bottom Layer w30: J2.4 686.15,2918.76 223.98,2918.76 184.98,2879.76 184.98,2335.76 195.74,2325 K3.2 334.98,2325 395.22,2264.76 1314.98,2264.76 1369.98,2319.76 1369.98,2387 1407.98,2425 K1.4 ; P2.6@1305,4285 P2.6@1505,4285
J1939L-B: J1.4 K1.6 K5.2 P3.6 | length 4943.5
  Component Side w30: v1(1119.74,1559.76) 1184.98,1625 K5.2 ; K1.6 1483.98,2525 1483.98,2591.76 1502.22,2610 1592.74,2610 1606.98,2595.76 1606.98,1254.59 1568.15,1215.76 1568.15,1155.59 1655.98,1067.76 1655.98,755.98 P3.6@1565,665
  Bottom Layer w30: J1.4 399.24,1790.76 255.98,1790.76 234.98,1769.76 234.98,1612.76 281.4,1566.34 1113.17,1566.34 v1(1119.74,1559.76) 1119.74,1396 1290.98,1224.76 1290.98,739.02 1365,665 P3.6@1565,665
LED1: U2.7
NetBeagleBoneBlack1_9: BeagleBoneBlack1.9
NetBeagleBoneBlack1_10: BeagleBoneBlack1.10 U1.1 U1.4 U1.10 U1.13 | length 1449
  Component Side w30: U1.4 2884.98,3225.02 2884.98,3424.98 U1.1 ; U1.10 3284.98,3124.98 3284.98,3325.02 U1.13
  Bottom Layer w30: U1.4 3035,3075 U1.10 ; U1.13 3355,3495 BeagleBoneBlack1.10
NetBeagleBoneBlack1_11: BeagleBoneBlack1.11 BeagleBoneBlack1.14 U1.8 | length 1096.2
  Component Side w30: U1.8 3375.98,3015.98 3375.98,3244.76 3576.22,3445 3639.74,3445 3660.98,3423.76 3660.98,3345.98 BeagleBoneBlack1.14
  Bottom Layer w30: BeagleBoneBlack1.14@3610,3295.02 BeagleBoneBlack1.11
NetBeagleBoneBlack1_12: BeagleBoneBlack1.12 BeagleBoneBlack1.22 U1.6 | length 1290.8
  Component Side w30: BeagleBoneBlack1.22 3559.98,2945.02 3559.98,3344.98 BeagleBoneBlack1.12
  Bottom Layer w30: U1.6 2984.76,3024.76 3280.22,3024.76 3359.98,2945 3560,2945 BeagleBoneBlack1.22
NetBeagleBoneBlack1_13: BeagleBoneBlack1.13 U7.1 | length 1783.5
  Bottom Layer w30: U7.1 3028.98,2500 3088.74,2559.76 3299.98,2559.76 3414.74,2445 3761.22,2445 3795.98,2479.76 3795.98,3209.02 BeagleBoneBlack1.13
NetBeagleBoneBlack1_16: BeagleBoneBlack1.16
NetBeagleBoneBlack1_19: BeagleBoneBlack1.19 U1.3 | length 891
  Bottom Layer w30: U1.3 3085.24,3124.76 3384.98,3124.76 3464.74,3045 3660,3045 BeagleBoneBlack1.19
NetBeagleBoneBlack1_20: BeagleBoneBlack1.20 U5.1 | length 1584.9
  Bottom Layer w30: U5.1 2610.09,2593.33 2999.89,2593.33 3191.32,2784.76 3317.98,2784.76 3378.22,2845 3641.24,2845 3660,2863.76 3660,2945 BeagleBoneBlack1.20
NetBeagleBoneBlack1_21: BeagleBoneBlack1.21 U7.3 | length 1143.4
  Component Side w30: U7.3 3103.98,2300 3136.98,2333 3136.98,2551.98 3369.98,2784.98 3369.98,2799.76 3415.22,2845 3660,2845 BeagleBoneBlack1.21
NetBeagleBoneBlack1_23: BeagleBoneBlack1.23 U1.11 | length 899.6
  Bottom Layer w30: U1.11 3420.74,3175 3450.74,3145 3743.98,3145 3760.98,3128 3760.98,2845.98 BeagleBoneBlack1.23
NetBeagleBoneBlack1_24: BeagleBoneBlack1.24 U3.4 | length 2930.3
  Component Side w30: v1(3571.74,1376.76) 3729.98,1376.76 3760.98,1407.76 3760.98,2728 3743.98,2745 3660,2745 BeagleBoneBlack1.24
  Bottom Layer w30: U3.4 2522.66,1455.76 3377.98,1455.76 3456.98,1376.76 v1(3571.74,1376.76)
NetBeagleBoneBlack1_26: BeagleBoneBlack1.26 U3.1 | length 1810.5
  Bottom Layer w30: U3.1 2538.98,1980.56 2538.98,2446.76 2650.55,2558.33 3017.48,2558.33 3083.15,2624 3434.98,2624 3455.98,2645 3560,2645 BeagleBoneBlack1.26
NetD1_2: D1.2 PTC1.1 | length 156.2
  Component Side w30: D1.2 2775,835 2780,830 PTC1.1
NetD2_1: D2.1 R13.2 | length 371.1
  Component Side w30: D2.1 3143.76,378.76 3238.98,378.76 3262.56,402.34 3262.56,487.44 R13.2
NetD2_2: D2.2 U2.10 | length 1519.2
  Component Side w30: U2.10 2389.74,1480 2980,889.74 D2.2
NetK6_2: K6.2 R8.2 | length 1898.1
  Bottom Layer w30: K6.2 1834.98,250 1884.74,299.76 2109.98,299.76 2201.32,208.42 3143.42,208.42 3201.65,266.65 3496.87,266.65 3558.45,328.23 R8.2
NetK6_5: K6.5 R12.2 | length 2743.1
  Bottom Layer w30: K6.5 1976.98,250 1931.74,204.76 1773.98,204.76 1754.98,223.76 1754.98,550.76 1824.98,620.76 3601.98,620.76 3662.98,559.76 3662.98,495.76 3627.98,460.76 3615,460.76 R12.2
NetR1_2: R1.2 U4.1 | length 379.9
  Bottom Layer w30: U4.1 3378.23,840 R1.2
NetR2_2: R2.2 U1.12 U4.4 | length 3330
  Component Side w30: U4.4 3685.67,965.67 R2.2 3795.98,1135.31 3795.98,3438 v1(3788.98,3445)
  Bottom Layer w30: U1.12 3389.98,3275 3559.98,3445 v1(3788.98,3445)
NetR3_1: R3.1 R4.1 U8.6 | length 1108.4
  Bottom Layer w30: R4.1 R3.1 2135,2538.78 2389.55,2793.33 2668.42,2793.33 U8.6
NetR5_1: R5.1 R6.1 U8.7 | length 2461.2
  Component Side w30: R6.1 2020,3878.74 2091.98,3806.76 2853,3806.76 2900,3759.76 2900,3703.76 3019.98,3583.78 3019.98,2974.76 2969.98,2924.76 2833.98,2924.76 2752.55,2843.33 U8.7
  Bottom Layer w30: R5.1 R6.1
NetR7_1: R7.1 R9.1 U9.6 | length 752.9
  Bottom Layer w30: R9.1 R7.1 2168.33,3335 2494.98,3335 2544.98,3285 U9.6
NetR10_1: R10.1 R11.1 U9.7 | length 1699.1
  Bottom Layer w30: R10.1 R11.1 1951.98,2971.35 1951.98,3348.76 2164.98,3561.76 2541.66,3561.76 U9.7
NetU1_2: U1.2 U5.4 | length 2460.5
  Component Side w30: U5.4 2368.42,2151.67 2368.42,2223.76 2396.33,2251.67 2448.33,2251.67 2563.42,2366.76 2563.42,3730.2 2594.98,3761.76 2742.39,3761.76 2984.98,3519.17 2984.98,3424.98 U1.2
NetU1_5: U1.5 U9.1 | length 731.5
  Bottom Layer w30: U9.1 2568.42,3335 2751.98,3335 2803.42,3283.56 2803.42,3206.58 U1.5
NetU1_9: U1.9 U8.1 | length 871.1
  Bottom Layer w30: U8.1 2468.42,2893.33 2826.98,2893.33 2858.41,2924.76 3184.76,2924.76 U1.9
NetU7_2: U7.2 U8.3 | length 798.2
  Component Side w30: v1(2814.98,2693.33) 2814.98,2481 2895.98,2400 U7.2
  Bottom Layer w30: U8.3 2468.42,2693.33 v1(2814.98,2693.33)
NetU7_4: U7.4 U9.3 | length 1646.2
  Component Side w30: v1(2770.98,2992.76) 2770.98,2911.76 2752.55,2893.33 2687.98,2893.33 2668.42,2873.78 2668.42,2712.89 2687.98,2693.33 2751.98,2693.33 2774.98,2670.33 2774.98,2375.76 2924.98,2225.76 2924.98,2200 U7.4
  Bottom Layer w30: U9.3 2451.74,3285 2501.74,3235 2751.98,3235 2768.42,3218.56 2768.42,2995.32 v1(2770.98,2992.76)
RAW: C10.1 D1.1 J1.2 J2.2 P2.8 P3.8 | length 7165.6
  Component Side w30: v1(1121.98,2941.76) 1121.98,1896.76 1087.98,1862.76 942.76,1862.76 J1.2 864.74,1720 888.98,1695.76 888.98,1665.76 1062.98,1491.76 1062.98,1454.76 1285.98,1231.76 1285.98,944.02 P3.8@1365,865
  Bottom Layer w30: J2.2 520.15,3082.76 831.98,3082.76 850.98,3063.76 850.98,2986.76 895.98,2941.76 v1(1121.98,2941.76) 1121.98,3304.76 1205.98,3388.76 1205.98,4385.98 1305,4485 1505,4485 1611.57,4378.43 C10.1 ; P3.8@1365,865 1565,865 1565,1031.78 1773.98,1240.76 2684.86,1240.76 D1.1
"Switch 1": BeagleBoneBlack1.P39 U2.1 | length 205.2
  Bottom Layer w30: BeagleBoneBlack1.P39 1895,1995 U2.1
"Switch 2": BeagleBoneBlack1.P40 U2.2 | length 305.2
  Bottom Layer w30: BeagleBoneBlack1.P40 1760,1945 1945,1945 U2.2
"Switch 3": BeagleBoneBlack1.P41 U2.3 | length 176.2
  Bottom Layer w30: BeagleBoneBlack1.P41 1886.98,1895 1901.98,1880 U2.3
"Switch 4": BeagleBoneBlack1.P42 U2.4 | length 317.6
  Bottom Layer w30: BeagleBoneBlack1.P42 1760,1845 1915,1845 U2.4
"Switch 5": BeagleBoneBlack1.P45 U2.5 | length 176.2
  Bottom Layer w30: BeagleBoneBlack1.P45 1886.98,1695 1901.98,1680 U2.5
"Switch 6": BeagleBoneBlack1.P46 U2.6 | length 317.6
  Bottom Layer w30: BeagleBoneBlack1.P46 1825,1580 U2.6
"SYS 5V": BeagleBoneBlack1.7 BeagleBoneBlack1.8 U3.3 U5.3 | length 3231.7
  Component Side w30: U3.3 2468.98,1710.56 2468.98,2151.11 U5.3 2573.5,2201.67 2598.42,2226.59 2598.42,3557.2 v1(2629.98,3588.76)
  Bottom Layer w30: v1(2629.98,3588.76) 2636.22,3595 BeagleBoneBlack1.8 BeagleBoneBlack1.7
pads on no net: BeagleBoneBlack1.15 BeagleBoneBlack1.17 BeagleBoneBlack1.18 BeagleBoneBlack1.25 BeagleBoneBlack1.27 BeagleBoneBlack1.28 BeagleBoneBlack1.29 BeagleBoneBlack1.30 BeagleBoneBlack1.31 BeagleBoneBlack1.32 BeagleBoneBlack1.33 BeagleBoneBlack1.34 BeagleBoneBlack1.35 BeagleBoneBlack1.36 BeagleBoneBlack1.37 BeagleBoneBlack1.38 BeagleBoneBlack1.39 BeagleBoneBlack1.40 BeagleBoneBlack1.41 BeagleBoneBlack1.42 BeagleBoneBlack1.J1-2 BeagleBoneBlack1.J1-3 BeagleBoneBlack1.J1-6 BeagleBoneBlack1.P3 BeagleBoneBlack1.P4 BeagleBoneBlack1.P5 BeagleBoneBlack1.P6 BeagleBoneBlack1.P7 BeagleBoneBlack1.P8 BeagleBoneBlack1.P9 BeagleBoneBlack1.P10 BeagleBoneBlack1.P11 BeagleBoneBlack1.P12 BeagleBoneBlack1.P13 BeagleBoneBlack1.P14 BeagleBoneBlack1.P15 BeagleBoneBlack1.P16 BeagleBoneBlack1.P17 BeagleBoneBlack1.P18 BeagleBoneBlack1.P19 BeagleBoneBlack1.P20 BeagleBoneBlack1.P21 BeagleBoneBlack1.P22 BeagleBoneBlack1.P23 BeagleBoneBlack1.P24 BeagleBoneBlack1.P25 BeagleBoneBlack1.P26 BeagleBoneBlack1.P27 BeagleBoneBlack1.P28 BeagleBoneBlack1.P29 BeagleBoneBlack1.P30 BeagleBoneBlack1.P31 BeagleBoneBlack1.P32 BeagleBoneBlack1.P33 BeagleBoneBlack1.P34 BeagleBoneBlack1.P35 BeagleBoneBlack1.P36 BeagleBoneBlack1.P37 BeagleBoneBlack1.P38 BeagleBoneBlack1.P43 BeagleBoneBlack1.P44 BeagleBoneBlack1.TP1 BeagleBoneBlack1.TP4 BeagleBoneBlack1.TP5 BeagleBoneBlack1.TP6 BeagleBoneBlack1.TP7 BeagleBoneBlack1.TP8 J1.0 J2.0 K1.2 K1.5 K2.3 K2.6 K4.3 K4.6 P1.2 P1.3 P1.6 U7.5 U7.6 U7.8 U7.9 U7.10 U7.11 U7.12 U7.13

## Keep-outs
Keep-Out Layer:
  region: 212.07,3406.45
  region: 212.07,3406.45
  region: 212.07,3406.45
  region: 212.07,3406.45
  region: 212.07,3406.45
  region: 212.07,3406.45
  region: 212.07,3406.45
  region: 212.07,3406.45
  region: 212.07,3406.45
  region: 212.07,3406.45
  region: 212.07,3406.45
  region: 212.07,3406.45
  region: 212.07,3406.45
  region: 212.07,3406.45
  region: 212.07,3406.45
  region: 212.07,3406.45
  region: 212.07,3406.45
  region: 212.07,3406.45
  region: 212.07,3406.45
  region: 212.07,3406.45
  region: 212.07,3406.45
  region: 212.07,3406.45
  region: 212.07,3406.45
  region: 212.07,3406.45
  lines w5: 2024.38,4665.19 cw(c2024.38,4583.64) 2105.92,4583.64 2105.92,3945.4 ccw(c2205.92,3945.4) 2205.92,3845.4 2886.92,3845.4 ccw(c2886.98,3947.34) 2988.92,3947.28 2988.92,4575.72 cw(c3077.62,4575.72) 3077.62,4664.41
  lines w10: 2024.38,4669.41 1686.63,4669.41 1229.41,4669.41 ccw(c1229.41,4573) 1133,4573 1133,4200 1133,3534 cw(c1059.5,3533.5) 1060,3460 160,3460 ccw(c160,3350) 50,3350 50,1489.85 ; 3077.62,4669.41 3760.16,4669.41 cw(c3760.16,4472.56) 3957.01,4472.56 ; 50,1489.85 ccw(c246.85,1489.85) 246.85,1293 ; 50,1489.85 ccw(c246.85,1489.85) 246.85,1293 ; 246.85,1293 917.01,1293 ; 246.85,1293 917.01,1293 ; 917.01,1293 cw(c917.01,1077.01) 1133,1077.01 ; 917.01,1293 cw(c917.01,1077.01) 1133,1077.01 ; 1133,36 ccw(c1224,36) 1224,-55 ; 1133,36 ccw(c1224,36) 1224,-55 ; 1133,36 1133,1077.01 ; 1133,36 1133,1077.01 ; 1224,-55 3760.16,-55 ; 1224,-55 3760.16,-55 ; 3760.16,-55 ccw(c3760.16,141.85) 3957.01,141.85 ; 3957.01,141.85 3957.01,4472.56 ; 3957.01,141.85 3957.01,4472.56

## Silkscreen, mask and mechanical layers (free items; w line width, h text height)
Top Overlay:
  text "A" at 1370,4590 h60
  text "A" at 1100,3005 h100 r180
  text "GND" at 3310,2980 h40
  text "1939H" at 553.73,2922.01 h30
  text "LIN" at 910.23,2919.01 h30
  text "GND" at 239.23,2918.01 h30
  text "+12V" at 405.48,2918.01 h30
  text "1939L" at 739.98,2918.01 h30
  text "EC2-5NU" at 1400,2910 h50 r90
  text "CAN2H" at 552.73,2859.01 h30
  text "IGN" at 909.23,2856.01 h30
  text "1708+" at 238.23,2855.01 h30
  text "1708-" at 404.48,2855.01 h30
  text "CAN2L" at 738.98,2855.01 h30
  text "Female HDR / M20-7820546" at 3430,2365 h40 r90
  text "EC2-5NU" at 390,2235 h50 r90
  text "EC2-5NU" at 885,2220 h50 r90
  text "EC2-5NU" at 1400,2205 h50 r90
  text "CAN2L" at 511.02,1874.99 h30 r180
  text "1708-" at 845.52,1874.99 h30 r180
  text "1708+" at 1011.77,1874.99 h30 r180
  text "IGN" at 340.77,1873.99 h30 r180
  text "CAN2H" at 697.27,1870.99 h30 r180
  text "1939L" at 510.02,1811.99 h30 r180
  text "+12V" at 844.52,1811.99 h30 r180
  text "GND" at 1010.77,1811.99 h30 r180
  text "LIN" at 339.77,1810.99 h30 r180
  text "1939H" at 696.27,1807.99 h30 r180
  text "B" at 145,1725 h100
  text "Beagle Bone Black (C) Header Example: Harwin M20-9982346" at 3870,1725 h40 r90
  text "EC2-5NU" at 1405,1490 h50 r90
  text "Debug Header" at 3165,160 h40
  text "GND" at 3090,125 h40 r270
  text "EC2-5NU" at 1960,105 h50 r90
  text "B" at 1350,-25 h60
  text "M20-9990546" at 3345,-25 h40
Bottom Overlay:
  text "Vbatt" at 1675,4560 h30 r35
  text "J1939H" at 1705,4460 h30 r35
  text "J1939L" at 1700,4365.16 h30 r35
  text "Truck Cape - The University of Tulsa - J. Daily - January. 2019, Rev 3 MITM" at 3900,4350 h54 r90
  text "J1708+" at 1700,4265 h30 r35
  text "J1708-" at 1695,4170.16 h30 r35
  text "CAN2H" at 1686.63,4070 h30 r35
  text "Fits Hammond Mfg. 1455L120 Extruded Aluminum Case" at 3110,4030 h60 r90
  text "CAN2L" at 1675,3965 h30 r35
  text "GND" at 1634.5,3815 h30 r35
  text "GND" at 3435,2980 h40
  text "1939H" at 694.69,2920.01 h30
  text "GND" at 322.19,2918.01 h30
  text "+12V" at 508.44,2918.01 h30
  text "1939L" at 865.94,2918.01 h30
  text "GND" at 982.19,2918.01 h30
  text "CAN2H" at 695.69,2857.01 h30
  text "1708+" at 323.19,2855.01 h30
  text "1708-" at 509.44,2855.01 h30
  text "CAN2L" at 866.94,2855.01 h30
  text "IGN" at 979.21,2855.01 h30
  text "IGN" at 270.79,1874.99 h30 r180
  text "CAN2L" at 383.06,1874.99 h30 r180
  text "1708-" at 740.56,1874.99 h30 r180
  text "1708+" at 926.81,1874.99 h30 r180
  text "CAN2H" at 554.31,1872.99 h30 r180
  text "GND" at 267.81,1811.99 h30 r180
  text "1939L" at 384.06,1811.99 h30 r180
  text "+12V" at 741.56,1811.99 h30 r180
  text "GND" at 927.81,1811.99 h30 r180
  text "1939H" at 555.31,1809.99 h30 r180
  text "Vbatt" at 1320,830.16 h30 r35
  text "J1939H" at 1320,758.9 h30 r35
  text "J1939L" at 1320,664.71 h30 r35
  text "J1708+" at 1320,570.51 h30 r35
  text "J1708-" at 1320,476.32 h30 r35
  text "CAN2H" at 1320,367.79 h30 r35
  text "CAN2L" at 1320,273.6 h30 r35
  text "GND" at 1305,145 h30 r35
  text "RX" at 3435,125 h40 r270
  text "TX" at 3540,110 h40 r270
  text "GND" at 3100,20 h40 r270

## Dimensions
2780,765 to 2780,565 on Mechanical 1

## Text inside footprints (layer, text, board x,y; h text height)
BeagleBoneBlack1: Top Overlay "TP4" at 3059,4352.5 h40 r90; Top Overlay "TP1" at 3390,2200 h40 r90; Top Overlay "J1-6" at 3516,2305.5 h40 r90; Top Overlay "J1-1" at 3509,3062.5 h40 r90; Top Overlay "BAT" at 3302,4047.5 h40 r90; Top Overlay "SENSE" at 3485,4151.5 h40 r90; Top Overlay "GND" at 3492,3829.5 h40 r90; Top Overlay "TS" at 3380.3,3831.51 h40 r90; Top Overlay "P8" at 1790,1495 h40 r90; Top Overlay "46" at 1722,1573.5 h40 r90; Top Overlay "1" at 1857,3957.5 h40 r90; Top Overlay "2" at 1721,3954.5 h40 r90; Top Overlay "46" at 3624,1572.5 h40 r90; Top Overlay "45" at 3744,1566.5 h40 r90; Top Overlay "2" at 3623,3954.5 h40 r90; Top Overlay "1" at 3737,3959.5 h40 r90; Top Overlay "BB USB" at 3272.13,1222.13 h60 r180; Top Overlay "P9" at 3685,1522.5 h40 r90; Top Overlay "5V Jack" at 3385,4211.5 h60 r90; Bottom Overlay "TP4" at 3059,4448.1 h40 r90; Bottom Overlay "TP1" at 3385,2265 h40 r90; Bottom Overlay "J1-6" at 3505,2432.5 h40 r90; Bottom Overlay "J1-1" at 3507,3175.76 h40 r90; Bottom Overlay "BAT" at 3380,4261.5 h40 r90; Bottom Overlay "SENSE" at 3480,4331.5 h40 r90; Bottom Overlay "GND" at 3492,3923.19 h40 r90; Bottom Overlay "TS" at 3377,3928.5 h40 r90; Bottom Overlay "1" at 1845,3982.16 h40 r90; Bottom Overlay "P8" at 1908,1723 h40 r90; Bottom Overlay "46" at 1745,1633 h40 r90; Bottom Overlay "P9" at 3684,1571.5 h40 r90; Bottom Overlay "2" at 3612,3982.5 h40 r90; Bottom Overlay "46" at 3620,1633.5 h40 r90; Bottom Overlay "1" at 3730,3972.5 h40 r90; Bottom Overlay "45" at 3738,1633.16 h40 r90
C7: Top Overlay "+" at 1955,1210 h40 r180; Top Overlay "-" at 1500,1210 h40 r180; Bottom Overlay "-" at 1575,1210 h40 r180; Bottom Overlay "+" at 1895,1210 h40 r180
C8: Top Overlay "+" at 2631.85,435 h40 r180; Top Overlay "-" at 2176.85,435 h40 r180; Bottom Overlay "-" at 2251.85,435 h40 r180; Bottom Overlay "+" at 2571.85,435 h40 r180
D2: Bottom Overlay "+" at 3146.93,295.32 h40; Bottom Overlay "-" at 2891.02,295.32 h40
J1: Top Overlay "1" at 1065,1695 h60; Top Overlay "6" at 1065,1900 h60; Top Overlay "10" at 145,1910 h60
J2: Top Overlay "1" at 184.99,3037.6 h60 r180; Top Overlay "6" at 184.99,2832.6 h60 r180; Top Overlay "10" at 1104.99,2822.6 h60 r180
K1: Top Overlay "NC" at 1605,2345 h30 r180; Top Overlay "N0" at 1605,2535 h30 r180; Top Overlay "NO" at 1195,2545 h30 r180; Top Overlay "NC" at 1195,2335 h30 r180; Top Overlay "COM" at 1195,2445 h30 r180
K2: Top Overlay "NC" at 1605,3050 h30 r180; Top Overlay "N0" at 1605,3240 h30 r180; Top Overlay "NO" at 1195,3250 h30 r180; Top Overlay "NC" at 1195,3040 h30 r180; Top Overlay "COM" at 1195,3150 h30 r180
K3: Top Overlay "COIL" at 635,2135 h30 r180; Top Overlay "NC" at 585,2345 h30 r180; Top Overlay "N0" at 585,2535 h30 r180; Top Overlay "NO" at 175,2545 h30 r180; Top Overlay "NC" at 175,2335 h30 r180; Top Overlay "COM" at 175,2445 h30 r180
K4: Top Overlay "COIL" at 1145,2135 h30 r180; Top Overlay "NC" at 1095,2345 h30 r180; Top Overlay "N0" at 1095,2535 h30 r180; Top Overlay "NO" at 685,2545 h30 r180; Top Overlay "NC" at 685,2335 h30 r180; Top Overlay "COM" at 685,2445 h30 r180
K5: Top Overlay "NC" at 1600,1645 h30 r180; Top Overlay "N0" at 1600,1835 h30 r180; Top Overlay "NO" at 1190,1845 h30 r180; Top Overlay "NC" at 1190,1635 h30 r180; Top Overlay "COM" at 1190,1745 h30 r180
K6: Top Overlay "COIL" at 2200,40 h30 r180; Top Overlay "NC" at 2155,270 h30 r180; Top Overlay "N0" at 2155,460 h30 r180; Top Overlay "NO" at 1745,470 h30 r180; Top Overlay "NC" at 1745,260 h30 r180
P2: Top Overlay "FFKDSA1/H-2.54- 8" at 1430,3720 h50 r90; Top Overlay "Wires and Tabs" at 1195,3950 h30 r90; Top Overlay "1" at 1591.22,3660 h40 r90; Top Overlay "8" at 1525,4595 h40 r90; Bottom Overlay "1" at 1525,3735 h40 r90; Bottom Overlay "8" at 1525,4565 h40 r90
P3: Top Overlay "FFKDSA1/H-2.54- 8" at 1475,275 h30 r90; Top Overlay "Wires and Tabs" at 1215,325 h30 r90; Top Overlay "1" at 1585,35 h40 r90; Top Overlay "8" at 1585,975 h40 r90; Bottom Overlay "1" at 1585,115 h40 r90; Bottom Overlay "8" at 1585,945 h40 r90
U6: Top Overlay "Vin" at 2562,1083 h40 r90; Top Overlay "TAB" at 2020,807 h40 r90; Top Overlay "GND" at 2654,812 h40 r90